# Altium PCB Omega2.PcbDoc
Units mm, origin at the board's own origin, x right, y up, seen from the top; angles counter-clockwise.
Board outline 58.75 x 75 mm, 2 copper layers (Top Layer, Bottom Layer); 44 components, 45 nets, 219 pads, 28 vias.
Unrouted connection lines stored in the file: 1.
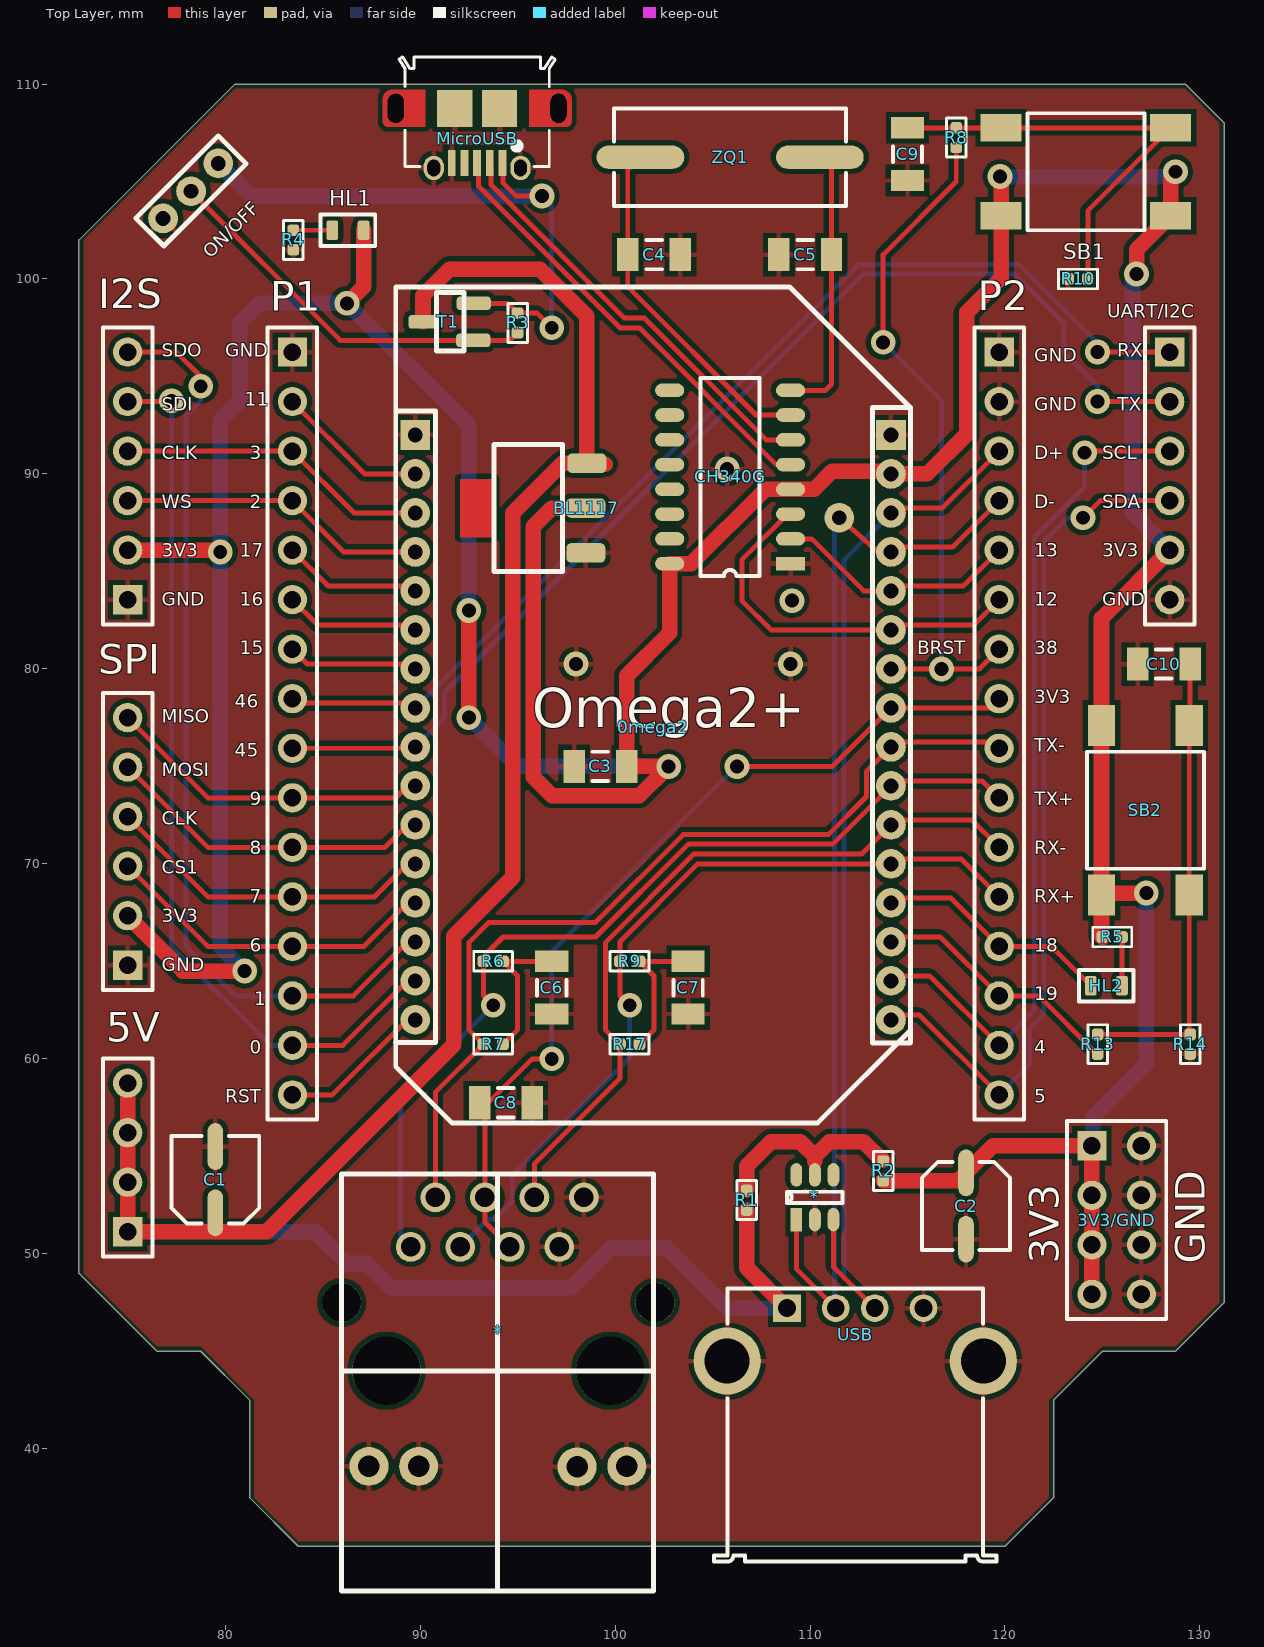
[diagram p0: Top Layer view]
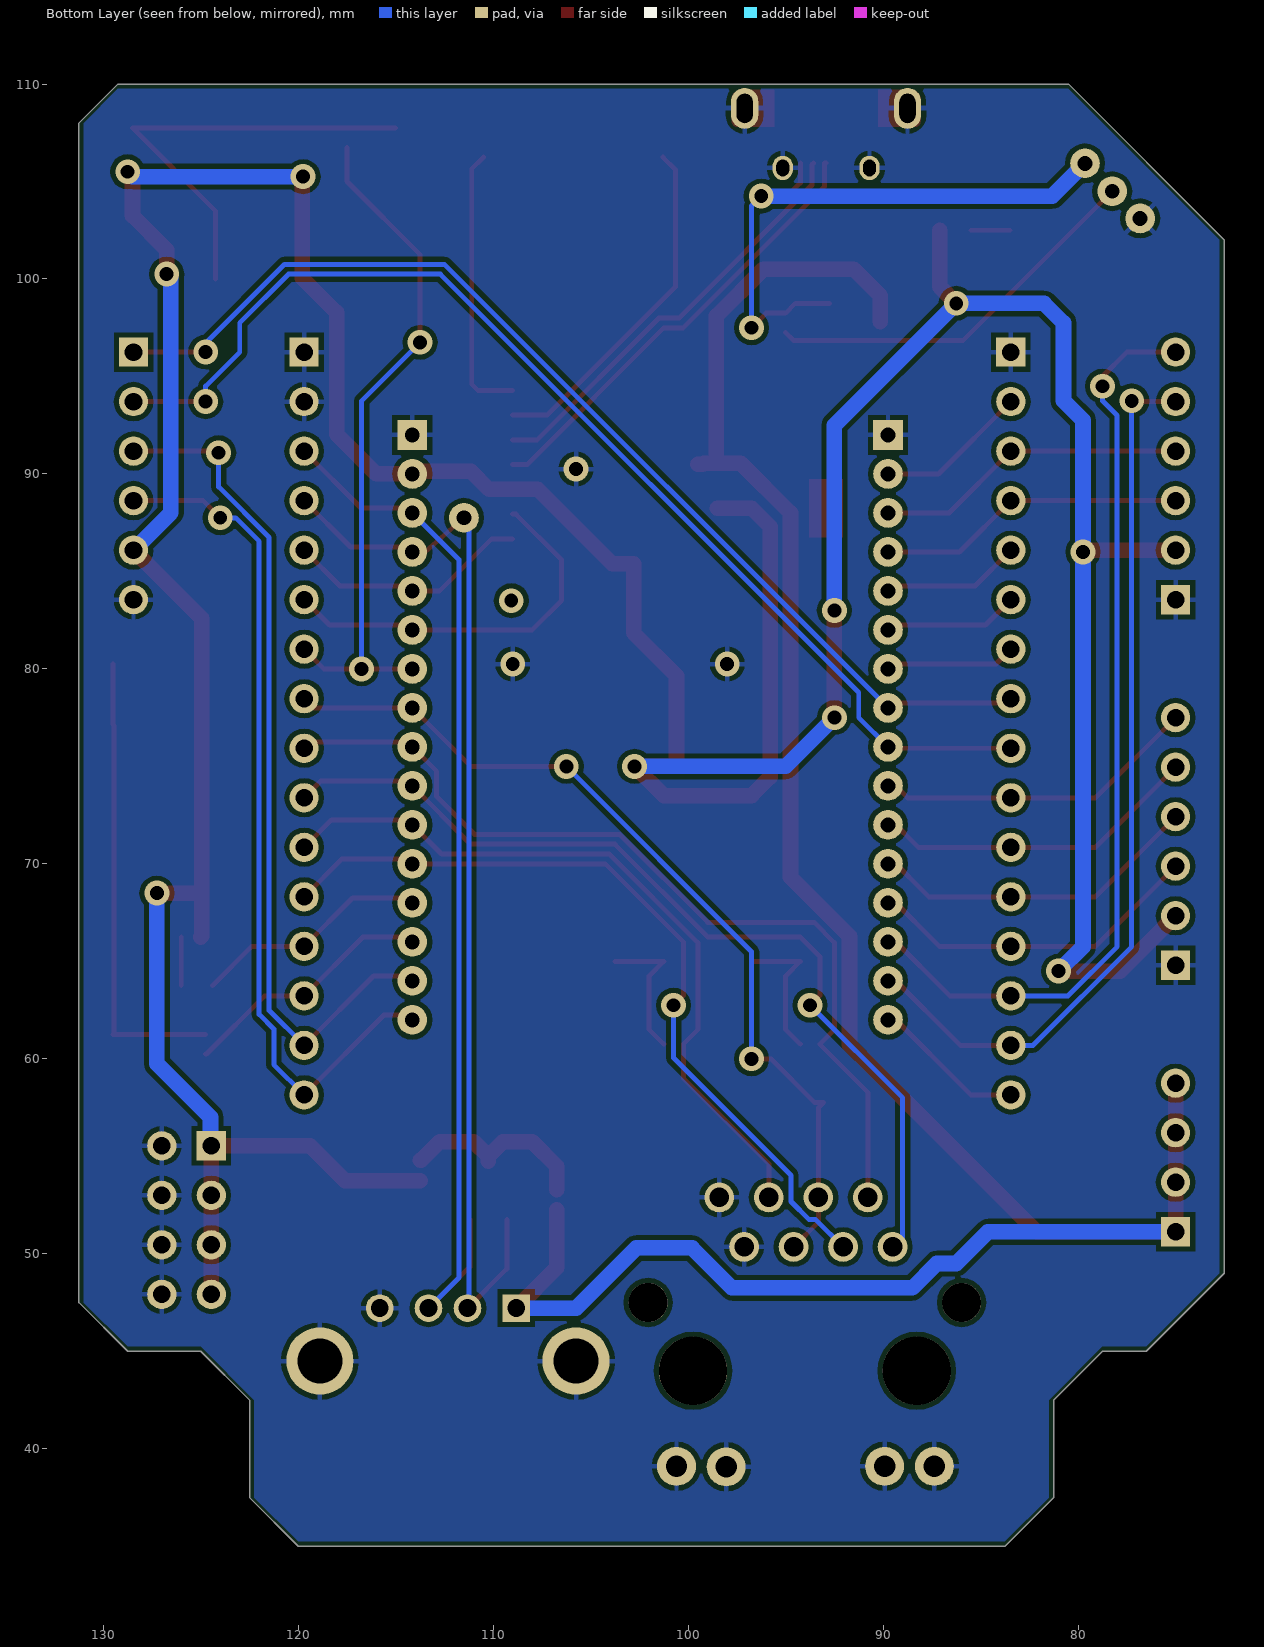
[diagram p1: Bottom Layer view, seen from below]

## Layer stack, top to bottom
Top Solder: solder mask 0.0102, Solder Resist, Dk 3.5
Top Layer: signal copper 0.0356
Dielectric 1: dielectric 0.32, FR-4, Dk 4.8
Bottom Layer: signal copper 0.0356
Bottom Solder: solder mask 0.0102, Solder Resist, Dk 3.5

## Board outline
78.75,45 81.25,42.5 81.25,37.5 83.75,35 120,35 122.5,37.5 122.5,42.5 125,45 128.75,45 131.25,47.5 131.25,108 129.25,110 80.5,110 72.5,102 72.5,49 76.5,45

## Design rules (kind name [scope] priority, off if disabled: settings)
Clearance [All] p1: gap=0.25 ignorepadtopadclearanceinfootprint=FALSE except(0.2: SMDPad-THPad)
ComponentClearance [All] p1 off: gap=0.254 collisioncheckmode=3 verticalgap=0.254 showdistances=TRUE
PolygonConnect [All] p1: connectstyle=Relief reliefconductorwidth=0.254 reliefentries=4 polygonreliefangle="90 Angle" airgapwidth=0.254
RoutingVias [All] p1: holewidth=0.4 width=0.8 viastyle="Through Hole" minholewidth=0.4 minwidth=0.8 maxholewidth=0.4 maxwidth=0.8
SolderMaskExpansion [All] p1: expansion=0.102 istentingtop=FALSE
Width [All] p1: maxlimit=10 minlimit=0.2 preferedwidth=0.8
29 further rules are at their usual default settings.

## Classes and differential pairs
component class OmegaDock: 3V3/GND 5V * BL1117 C1 C2 C3 C4 C5 C6 C7 C8 C9 C10 CH340G HL1 HL2 I2S MicroUSB ON/OFF P1 P2 R3 R4 R5 R6 R7 R8 R9 R10 R13 R14 R17 SB1 SB2 SPI T1 UART/I2C USB ZQ1

## Components (designator, comment, footprint, x,y, rotation, side; value= is the part's Value field where it differs from the comment)
0mega2 "Omega2" Omega2PCB 88.75,99.6 r0 top
3V3/GND "Header 4X2" HDR2X4 124.46,55.54 r270 top
5V "Header 4" HDR1X4 75,51.13 r90 top
* "SRV05-4" SOT23-6L 109.3,51.75 r90 top
* "RJ45" R911105A 101.975,54.1 r270 top
BL1117 "BL1117-3.3" SOT223 93.8,85 r90 top
C1 "/Укажите код маркировки/" C_Al_B 79.5,53.8 r180 top value="10 ìê"
C2 "/Укажите код маркировки/" C_Al_B 118,52.45 r0 top value="22 ìê"
C3 "Cap Semi" C1206 99.25,75 r180 top value=100pF
C4 "Cap Semi" C1206 102,101.25 r0 top value=22pF
C5 "Cap Semi" C1206 109.75,101.25 r180 top value=22pF
C6 "Cap Semi" C1206 96.75,63.65 r90 top value=100nF
C7 "Cap Semi" C1206 103.75,63.65 r90 top value=100nF
C8 "Cap Semi" C1206 94.4,57.75 r180 top value=100nF
C9 "Cap Semi" C1206 115,106.4 r90 top value=100nF
C10 "Cap Semi" C1206 128.15,80.25 r0 top value=100nF
CH340G "CH340G" SO16 109,85.4 r180 top
HL1 "0603 White" LED_0603_White_Manual_mount 86.3,102.5 r0 top
HL2 "blue" LED_0603_Blue_Manual_mount 125.2,63.75 r0 top
I2S "Header 6" HDR1X6 75,83.55 r90 top
MicroUSB "629105150921" 629105150921 92.925,108.455 r180 top
ON/OFF "SlideSwitch" SlideSwitch 79.647,105.932 r225 top
P1 "Header 16" HDR1X16 83.45,96.25 r270 top
P2 "Header 16" HDR1X16 119.7,96.25 r270 top
R1 "/Укажите код маркирвки/" R_0402_Manual_mount 106.75,52.75 r270 top value="1 ê"
R2 "/Укажите код маркирвки/" R_0402_Manual_mount 113.75,54.25 r270 top value="1 ê"
R3 "/Укажите код маркирвки/" R_0402_Manual_mount 95,97.75 r270 top value="10 ê"
R4 "/Укажите код маркирвки/" R_0402_Manual_mount 83.5,102 r270 top value="1 ê"
R5 "/Укажите код маркирвки/" R_0402_Manual_mount 125.5,66.25 r0 top value="1 ê"
R6 "/Укажите код маркирвки/" R_0402_Manual_mount 93.75,65 r0 top value=50
R7 "/Укажите код маркирвки/" R_0402_Manual_mount 93.75,60.75 r0 top value=50
R8 "/Укажите код маркирвки/" R_0402_Manual_mount 117.5,107.25 r270 top value="1 ê"
R9 "/Укажите код маркирвки/" R_0402_Manual_mount 100.75,65 r0 top value=50
R10 "/Укажите код маркирвки/" R_0402_Manual_mount 123.75,100 r180 top value="3 ê"
R13 "/Укажите код маркирвки/" R_0402_Manual_mount 124.75,60.75 r270 top value="1 ê"
R14 "/Укажите код маркирвки/" R_0402_Manual_mount 129.5,60.75 r270 top value="3 ê"
R17 "/Укажите код маркирвки/" R_0402_Manual_mount 100.75,60.75 r0 top value=50
SB1 "Tact_switch" Tact_switch_6x6x7 124.15,105.5 r0 top
SB2 "Tact_switch" Tact_switch_6x6x7 127.2,72.75 r90 top
SPI "Header 6" HDR1X6 75,64.8 r90 top
T1 "SomeSemiconductor" SOT23 90.85,96.3 r90 top
UART/I2C "Header 6" HDR1X6 128.45,96.25 r270 top
USB "61400416021" 61400416021 112.32,41.22 r0 top
ZQ1 "/Укажите код маркировки/" HC-49SM 105.9,106.25 r0 top value="12 ÌÃö"

## Footprints (in the part's own frame and the unit in brackets; to place one, negate y for a bottom-side part, rotate by r counter-clockwise, add the part's x,y. Pads: shape width x height; smd on the part's side, far side on the other; paste and mask are expansions set on the pad)
61400416021 [mm] "USB 2.0 Type A Horizontal"
  rect 1.42x1.42 hole 0.92: 1(-3.5,5.99)
  round 1.42 hole 0.92: 2(-1,5.99) 3(1,5.99) 4(3.5,5.99)
  round 3.45 hole 2.3: Shell(-6.57,3.28) Shell(6.57,3.28)
  silkscreen extent -7.25,-7 7.25,7, body extent -8,-7 8,7, height 7.63
629105150921 [mm] "Micro USB 2.0 Type AB Horizontal"
  rect 0.4x1.35 smd: 1(-1.3,2.51) 2(-0.65,2.51) 3(0,2.51) 4(0.65,2.51) 5(1.3,2.51)
  round 0 / inner round 0 / far side oval 1.4x2.1 hole 0.825 slot 1.5 at 90 deg mask+0.102: Shell(-4.175,-0.295) Shell(4.175,-0.295)
  oval 1.05x1.25 hole 0.65 slot 0.85 at 90 deg: Shell(-2.225,2.76) Shell(2.225,2.76)
  rect 1.8x1.9 smd: Shell(-1.15,-0.295) Shell(1.15,-0.295)
  Top Layer region: 4.353,-1.245 4.544,-1.207 4.706,-1.099 4.814,-0.936 4.852,-0.745 4.852,-0.745 4.852,0.355 4.83,0.47 4.765,0.567 4.667,0.632 4.553,0.655 4.553,0.655 2.668,0.655 2.668,-1.245
  Top Layer region: -4.353,-1.245 -4.544,-1.207 -4.706,-1.099 -4.814,-0.936 -4.852,-0.745 -4.852,-0.745 -4.852,0.355 -4.83,0.47 -4.765,0.567 -4.667,0.632 -4.553,0.655 -4.553,0.655 -2.668,0.655 -2.668,-1.245
  silkscreen extent -4,-2.94 4,2.68, body extent -4.3,-2.93 4.3,2.93, height 2.78
C1206 [mm] "Chip Capacitor, Body 3.2x1.6mm, IPC High Density"
  rect 1.1x1.7 smd: 1(-1.35,0) 2(1.35,0)
  silkscreen extent -0.4,-0.75 0.4,0.75, body extent -1.7,-0.9 1.7,0.9, height 1.3
C_Al_B [mm] "D=4; L=5.4; A=4.3; P=1."
  oval 0.8x2.4 smd: 1(0,1.7) 2(0,-1.7)
  silkscreen extent -2.25,-2.25 2.25,2.25, body extent -2.15,-2.3 2.15,2.3, height 5.4
HC-49SM [mm] "SMD quartz"
  oval 4.5x1.2 smd: 1(-4.6,0) 2(4.6,0)
  silkscreen extent -5.95,-2.5 5.95,2.5, body extent -6.25,-2.4 6.25,2.4, height 4
HDR1X4 [mm] "Connector; Header; 4 Position"
  rect 1.5x1.5 hole 0.9: 1(0,0)
  round 1.5 hole 0.9: 2(2.54,0) 3(5.08,0) 4(7.62,0)
  silkscreen extent -1.27,-1.27 8.89,1.27, body extent -0.85,-0.85 8.47,0.85, height 10
HDR1X6 [mm] "Connector; Header; 6 Position"
  rect 1.5x1.5 hole 0.9: 1(0,0)
  round 1.5 hole 0.9: 2(2.54,0) 3(5.08,0) 4(7.62,0) 5(10.16,0) 6(12.7,0)
  silkscreen extent -1.27,-1.27 13.97,1.27, body extent -0.85,-0.85 13.55,0.85, height 10
HDR1X16 [mm] "Connector; Header; 16 Position"
  rect 1.5x1.5 hole 0.9: 1(0,0)
  round 1.5 hole 0.9: 2(2.54,0) 3(5.08,0) 4(7.62,0) 5(10.16,0) 6(12.7,0) 7(15.24,0) 8(17.78,0) 9(20.32,0) 10(22.86,0) 11(25.4,0) 12(27.94,0) 13(30.48,0) 14(33.02,0) 15(35.56,0) 16(38.1,0)
  silkscreen extent -1.27,-1.27 39.37,1.27, body extent -0.85,-0.85 38.95,0.85, height 10
HDR2X4 [mm] "Connector; Header; 4x2 Position"
  rect 1.5x1.5 hole 0.9: 1(0,0)
  round 1.5 hole 0.9: 2(0,2.54) 3(2.54,0) 4(2.54,2.54) 5(5.08,0) 6(5.08,2.54) 7(7.62,0) 8(7.62,2.54)
  silkscreen extent -1.27,-1.27 8.89,3.81, body extent -0.85,-0.85 8.47,3.39, height 10
LED_0603_Blue_Manual_mount [mm] "SMD 0603"
  rrect35% 0.6x1 smd: A(0.8,0) C(-0.8,0)
  silkscreen extent -1.4,-0.8 1.4,0.8, body extent -0.8,-0.43 0.8,0.43, height 0.45
LED_0603_White_Manual_mount [mm] "SMD 0603"
  rrect35% 0.6x1 smd: A(0.8,0) C(-0.8,0)
  silkscreen extent -1.4,-0.8 1.4,0.8, body extent -0.8,-0.43 0.8,0.43, height 0.45
Omega2PCB [mil]
  rect 60x60 hole 30: 1(39.37,-299.21) 32(1000,-299.21)
  round 60 hole 30: 2(39.37,-377.95) 3(39.37,-456.69) 4(39.37,-535.43) 5(39.37,-614.17) 6(39.37,-692.91) 7(39.37,-771.65) 8(39.37,-850.39) 9(39.37,-929.13) 10(39.37,-1007.87) 11(39.37,-1086.61) 12(39.37,-1165.35) 13(39.37,-1244.09) 14(39.37,-1322.83) 15(39.37,-1401.57) 16(39.37,-1480.31) 17(1000,-1480.31) 18(1000,-1401.57) 19(1000,-1322.83) 20(1000,-1244.09) 21(1000,-1165.35) 22(1000,-1086.61) 23(1000,-1007.87) 24(1000,-929.13) 25(1000,-850.39) 26(1000,-771.65) 27(1000,-692.91) 28(1000,-614.17) 29(1000,-535.43) 30(1000,-456.69) 31(1000,-377.95)
  silkscreen extent 0,-1689 1039,0
R911105A [mm]
  round 1.524 hole 1: 1(3.75,-12.46) 2(1.21,-11.19) 3(3.75,-9.92) 4(1.21,-8.65) 5(3.75,-7.38) 6(1.21,-6.11) 7(3.75,-4.84) 8(1.21,-3.57)
  round 2 hole 1.1: 9(15,-14.6) 10(15,-12.05) 11(15.025,-3.925) 12(15,-1.375)
  round 2 hole 2: X(6.6,-16) X(6.6,0.075)
  round 3.5 hole 3.5: X(10.1,-13.7) X(10.1,-2.225)
  silkscreen extent 0,-16 21.4,0
R_0402_Manual_mount [mm] "SMD 0402"
  rrect50% 0.6x0.6 smd: 1(-0.5,0) 2(0.5,0)
  silkscreen extent -1,-0.5 1,0.5, body extent -0.5,-0.25 0.5,0.25, height 0.35
SlideSwitch [mil]
  round 60 hole 30: 0(0,0) 1(78.74,0.98) 2(157.48,0)
  silkscreen extent -39,-39 196,40, body extent -34,-34 191,35, height 394
SO16 [mm]
  rect 1.5x0.7 smd: 1(0,0)
  oval 1.5x0.7 smd: 2(0,-1.27) 3(0,-2.54) 4(0,-3.81) 5(0,-5.08) 6(0,-6.35) 7(0,-7.62) 8(0,-8.89) 9(6.2,-8.89) 10(6.2,-7.62) 11(6.2,-6.35) 12(6.2,-5.08) 13(6.2,-3.81) 14(6.2,-2.54) 15(6.2,-1.27) 16(6.2,0)
  silkscreen extent 1.59,-9.53 4.62,0.63, body extent 1.58,-9.53 4.62,0.64, height 2
SOT23 [mm]
  rrect50% 0.7x1.75 smd: 0(0.55,-1.875) 1(2.45,-1.9)
  rrect50% 0.7x1.5 smd: 2(1.5,0.7)
  silkscreen extent 0,-1.4 3,0, body extent -0.13,-1.53 3.13,0.13, height 2
SOT23-6L [mm]
  rect 1.2x0.6 smd: 1(0,0)
  oval 1.2x0.6 smd: 2(0,-0.95) 3(0,-1.9) 4(2.3,-1.9) 5(2.3,-0.95) 6(2.3,0)
  silkscreen extent 0.87,-2.38 1.43,0.48
SOT223 [mm]
  rrect50% 1x2 smd: 1(5.55,-4.75) 2(0.95,-4.7) 3(3.25,-4.7)
  Top Layer region: 1.75,0 4.75,0 4.75,1.75 1.75,1.75
  silkscreen extent 0,-3.5 6.5,0, body extent -0.13,-3.63 6.63,0.13, height 2
Tact_switch_6x6x7 [mm] "Tact switch"
  rect 2.1x1.4 smd: 1(-4.35,2.25) 1(4.35,2.25) 2(-4.35,-2.25) 2(4.35,-2.25)
  silkscreen extent -3,-3 3,3, body extent -5,-3 5,3, height 7

## Part data
3V3/GND: "Header, 4-Pin, Dual row", LatestRevisionDate=17-Jul-2002, LatestRevisionNote="Re-released for DXP Platform.", Publisher="Altium Limited"
5V: "Header, 4-Pin", LatestRevisionDate=17-Jul-2002, LatestRevisionNote="Re-released for DXP Platform.", Publisher="Altium Limited"
C1 C2: library part Capacitor_Electrolytic_B, "SMD Electrolytic Capacitor", Manufacturer="/Óêàæèòå êîìïàíèþ-ïðîèçâîäèòåëÿ/", Rated voltage="25 Â", Temperature range="/Ôîðìàò: -? ... ? °C/", Tolerance="/Óêàæèòå äîïóñê â ïðîöåíòàõ/", ESR="/Óêàæèòå çíà÷åíèå ÝÏÑ/", Size=B, Type="Êîíäåíñàòîð ýëåêòðîëèòè÷åñêèé"
C3 C4 C5 C6 C7 C8 C9 C10: "Capacitor (Semiconductor SIM Model)", LatestRevisionDate=29-May-2009, LatestRevisionNote="IPC-7351 Footprint Added.", PackageDescription="Chip Capacitor", PackageReference=C1206, Published=8-Jun-2000, Publisher="Altium Limited"
HL1 HL2: library part "LED 0603", "SMD LED", Color="/Óêàæèòå öâåò/", Forward voltage="/Óêàæèòå ïðÿìîå íàïðÿæåíèå/", Manufacturer="/Óêàæèòå êîìïàíèþ-ïðîèçâîäèòåëÿ/", Max. forward current="/Óêàæèòå äîïóñòèìûé ïðÿìîé òîê/", Max. reverse voltage="/Óêàæèòå ìàêñèìàëüíîå îáðàòíîå íàïðÿæåíèå/", Power dissitipation="/Óêàæèòå ìàêñèìàëüíóþ ðàññåèâàåìóþ ìîùíîñòü/", Temperature range="/Ôîðìàò: -? ... ? °C/", Size=0603, Type=Ñâåòîäèîä
I2S SPI UART/I2C: "Header, 6-Pin", LatestRevisionDate=17-Jul-2002, LatestRevisionNote="Re-released for DXP Platform.", Publisher="Altium Limited"
MicroUSB: "Micro USB 2.0 Type AB Horizontal WR-COM", ComponentLink1Description=Manufacturer, ComponentLink1URL=http://www.we-online.de, ComponentLink2Description=Datasheet, ComponentLink2URL=http://katalog.we-online.de/em/datasheet/629105150921.pdf, Construction=SMT, Gender=Receptacle, Interface Type="Type AB", Part Number=629105150921, Published Date="April 2017", Publisher="Wurth Elektronik", Sub-Family="Micro USB 2.0", Type=Horizontal
P1 P2: "Header, 16-Pin", LatestRevisionDate=17-Jul-2002, LatestRevisionNote="Re-released for DXP Platform.", Publisher="Altium Limited"
R1 R2 R3 R4 R5 R6 R7 R8 R9 R10 R13 R14 R17: library part Resistor, "SMD Resistor", Manufacturer="/Óêàæèòå êîìïàíèþ-ïðîèçâîäèòåëÿ/", Power dissitipation="/Óêàæèòå ìàêñèìàëüíóþ ðàññåèâàåìóþ ìîùíîñòü/", Temperature coefficient="/Ôîðìàò: ±? ppm/°C/", Temperature range="/Ôîðìàò: -? ... ? °C/", Tolerance="/Óêàæèòå äîïóñê â ïðîöåíòàõ/", Size="/Óêàæèòå äþéìîâûé òèïîðàçìåð/", Type="Ðåçèñòîð ïîñòîÿííûé"
SB1 SB2: "SMD pushbutton", Junction resistance="100 ìÎì", Manufacturer=NONAME, Rated current="50 ìÀ", Rated voltage="12 Â", Life cycles=100000, Type="Âûêëþ÷àòåëü êíîïî÷íûé ñ ñàìîâîçâðàòîì"
USB: "USB 2.0 Type A Horizontal WR-COM", ComponentLink1Description=Manufacturer, ComponentLink1URL=http://www.we-online.de, ComponentLink2Description=Datasheet, ComponentLink2URL=http://katalog.we-online.de/em/datasheet/61400416021.pdf, Construction=THT, Gender=Receptacle, Interface Type="Type A", Part Number=61400416021, Published Date="April 2017", Publisher="Wurth Elektronik", Sub-Family="USB 2.0", Type=Horizontal
ZQ1: library part Quartz, "QUARTZ CRYSTAL", Frequency stability="/Ôîðìàò: ±? ppm/", Load capacitance="/Óêàæèòå íîìèíàë íàãðóçî÷íîé åìêîñòè/", Manufacturer="/Óêàæèòå êîìïàíèþ-ïðîèçâîäèòåëÿ/", Temperature range="/Ôîðìàò: -? ... ? °C/", Type="Êâàðöåâûé ðåçîíàòîð"

## Free pads (board coordinates)
  round 1.524 hole 0.762: 4(111.5,87.75)

## Via types
v1: diameter 1.27, hole 0.711, Top Layer to Bottom Layer, 28 vias

## Nets (pads, with @x,y where several pads share a name; then routed paths per layer and width w, separated by ;. In a path a pad name is that pad's centre, name@x,y a point inside that pad or via, vN(x,y) a via of type N, cw(c..) or ccw(c..) an arc to the next point about the centre after c; other vN are vias at no path point)
3V3: 0mega2.31 3V3/GND.1 3V3/GND.3 3V3/GND.5 3V3/GND.7 BL1117.3 C2.1 C3.1 CH340G.4 CH340G.16 HL1.A I2S.2 R2.2 R5.1 SB1.2 SB2.1 SPI.2 UART/I2C.5 | length 247.8
  Top Layer w0.8: SPI.2 77.84,64.5 v1(81,64.5) ; I2S.2 79.66,86.09 v1(79.75,86) ; v1(86.25,98.75) 87.1,99.6 HL1.A ; v1(92.5,77.5) v1(92.5,83) ; BL1117.3 96.75,88.25 95.8,87.3 95.8,74.45 96.75,73.5 101.25,73.5 v1(102.75,75) C3.1 100.6,77.5 100.6,79.65 102.8,81.85 CH340G.16 103.9,85.4 107.71,89.21 CH340G.4 110.21,89.21 111.135,90.135 114.015,90.135 0mega2.31 116,90 118.035,92.035 118.035,98.285 119.8,100.05 119.8,103.25 119.8,105.2 v1(119.75,105.25) ; R2.2 117.6,53.75 C2.1 119.39,55.54 3V3/GND.1 3V3/GND.3 3V3/GND.5 3V3/GND.7 ; R5.1 124.95,66.3 SB2.1@124.95,68.4 ; v1(126.75,100.25) 126.75,101.5 128.5,103.25 128.5,105.25 v1(128.75,105.5) ; v1(127.25,68.5) 125.05,68.5 SB2.1@124.95,68.4 ; UART/I2C.5 124.95,82.59 124.95,77.1 SB2.1@124.95,68.4
  Bottom Layer w0.8: v1(81,64.5) 79.75,65.75 v1(79.75,86) 79.75,92.75 80.75,93.75 80.75,97.75 81.75,98.75 v1(86.25,98.75) 92.5,92.5 v1(92.5,83) ; v1(92.5,77.5) 95,75 v1(102.75,75) ; v1(119.75,105.25) 128.5,105.25 v1(128.75,105.5) ; 3V3/GND.1 124.5,55.58 124.5,57 127.25,59.75 v1(127.25,68.5) ; v1(126.75,100.25) 126.54,100.04 126.54,88 UART/I2C.5
BTN1: 0mega2.19 P2.14 R13.2 | length 13.2
  Top Layer w0.254: 0mega2.19@114,66.25 116.68,66.25 P2.14 121.725,63.23 124.705,60.25 R13.2
CS1: 0mega2.13 P1.13 SPI.3 | length 17.3
  Top Layer w0.254: SPI.3 79.11,65.77 P1.13 87.12,65.77 0mega2.13@89.6,68.25
GND: 0mega2.1 0mega2.32 3V3/GND.2 3V3/GND.4 3V3/GND.6 3V3/GND.8 *.2@110.25,51.75 *.7 *.8 *.9 *.10 *.11 *.12 BL1117.2 C1.2 C2.2 C3.2 C4.2 C5.2 C6.1 C7.1 C8.1 C9.1 C10.1 CH340G.1 I2S.1 MicroUSB.5 MicroUSB.Shell ON/OFF.2 P1.1 P2.1 P2.2 R4.2 R10.2 R14.2 SPI.1 UART/I2C.6 USB.4 USB.Shell
  other v1: 98,80.25 109,80.25 105.75,90.25
I2S_CLK: 0mega2.3 I2S.4 P1.3 | length 16.1
  Top Layer w0.254: I2S.4 P1.3 86.62,88 0mega2.3@89.76,88
LED1: 0mega2.20 HL2.C P2.13 | length 12.3
  Top Layer w0.254: 0mega2.20@114,68.25 117.22,68.25 P2.13 122.38,65.77 HL2.C
MISO: 0mega2.10 P1.10 SPI.6 | length 16.7
  Top Layer w0.254: SPI.6 79.11,73.39 P1.10 88.74,73.39 0mega2.10@89.6,74.25
MOSI: 0mega2.11 P1.11 SPI.5 | length 16.9
  Top Layer w0.254: SPI.5 79.11,70.85 P1.11 88.2,70.85 0mega2.11@89.6,72.25
Net0mega2_2: 0mega2.2 P1.2 | length 7.8
  Top Layer w0.254: P1.2 87.16,90 0mega2.2@89.76,90
Net0mega2_5: 0mega2.5 P1.5 | length 6.9
  Top Layer w0.254: P1.5 85.29,84.25 0mega2.5@89.6,84.25
Net0mega2_6: 0mega2.6 P1.6 | length 6.7
  Top Layer w0.254: P1.6 84.75,82.25 0mega2.6@89.6,82.25
Net0mega2_7: 0mega2.7 P1.7 | length 6.5
  Top Layer w0.254: P1.7 84.21,80.25 0mega2.7@89.6,80.25
Net*_5: *.5@110.25,54.05 R1.1 R2.1 | length 10
  Top Layer w0.8: R1.1@106.75,53.3 106.75,54.5 108,55.75 109.5,55.75 110.25,55 ; 110.25,54.744 110.25,55 ; R2.1@113.75,54.8 113.7,54.8 112.75,55.75 111,55.75 110.25,55
NET_POW: 0mega2.25 *.4@93.325,52.89 *.5@94.595,50.35 C8.2 P2.8 | length 46.5
  Top Layer w0.254: *.5@94.595,50.35 93.325,51.62 93.325,52.89 93.325,57.475 C8.2 93.5,57.75 95.75,60 v1(96.75,60) ; v1(106.25,75) 111.15,75 0mega2.25 119.23,78 P2.8
  Bottom Layer w0.254: v1(96.75,60) 96.75,65.5 v1(106.25,75)
NetC4_1: C4.1 CH340G.7 ZQ1.1 | length 18
  Top Layer w0.254: ZQ1.1 100.65,105.6 C4.1 100.65,99.6 107.23,93.02 CH340G.7
NetC5_1: C5.1 CH340G.8 ZQ1.2 | length 14.1
  Top Layer w0.254: CH340G.8 110.79,94.29 111.1,94.6 C5.1 111.1,105.65 ZQ1.2
NetC6_2: C6.2 R6.2 R7.2 | length 7.4
  Top Layer w0.254: R7.2 95,61.5 95,64.25 R6.2 C6.2
NetC7_2: C7.2 R9.2 R17.2 | length 7.4
  Top Layer w0.254: R17.2 102,61.5 102,64.25 R9.2 C7.2
NetC9_2: C9.2 R8.1 R10.1 SB1.1 | length 23
  Top Layer w0.254: C9.2 R8.1 119.8,107.75 128.5,107.75 124.25,103.5 R10.1
NetC10_2: C10.2 R13.1 R14.1 SB2.2 | length 23.8
  Top Layer w0.254: R13.1 R14.1 129.45,61.3 129.45,68.4 129.45,77.1 129.5,77.15 C10.2
NetHL1_C: HL1.C R4.1 | length 2
  Top Layer w0.254: R4.1 HL1.C
NetHL2_A: HL2.A R5.2 | length 2.5
  Top Layer w0.254: HL2.A R5.2
NetMicroUSB_1: MicroUSB.1 ON/OFF.0 R3.1 T1.1 | length 32.1
  Top Layer w0.254: T1.1 94.5,98.75 R3.1 96,98.25 v1(96.75,97.5) ; MicroUSB.1 94.248,105.922 94.248,104.93 94.928,104.25 v1(96.25,104.25)
  Bottom Layer w0.254: v1(96.25,104.25) 96.75,103.75 v1(96.75,97.5)
  Bottom Layer w0.8: ON/OFF.0 81.328,104.25 v1(96.25,104.25)
NetON/OFF_1: ON/OFF.1 R3.2 T1.0 | length 20.1
  Top Layer w0.254: ON/OFF.1 85.9,96.85 T1.0 94.6,96.85 R3.2
RESET_BTN: 0mega2.26 P2.7 R8.2 | length 35.5
  Top Layer w0.254: v1(113.75,96.75) 113.75,101.25 117.5,105 R8.2 ; 0mega2.26 v1(116.75,80) 118.69,80 P2.7
  Bottom Layer w0.254: v1(113.75,96.75) 116.75,93.75 v1(116.75,80)
RST: 0mega2.16 P1.16 | length 7.8
  Top Layer w0.254: P1.16 85.5,58.15 0mega2.16@89.6,62.25
RX1: 0mega2.8 P1.8 UART/I2C.1 | length 56.5
  Top Layer w0.254: P1.8 83.67,78.25 0mega2.8@89.6,78.25 ; v1(124.75,96.25) UART/I2C.1
  Bottom Layer w0.254: 0mega2.8 112.504,100.754 120.709,100.754 124.75,96.713 v1(124.75,96.25)
RX+: 0mega2.21 *.3@92.055,50.35 P2.12 R9.1 | length 41.7
  Top Layer w0.254: v1(100.75,62.75) 100.25,63.25 R9.1 100.25,66 104.25,70 0mega2.21@114.16,70 ; 0mega2.21@114,70.25 117.76,70.25 P2.12
  Bottom Layer w0.254: *.3@92.055,50.35 93.456,51.751 93.797,51.751 94.726,52.68 94.726,54.029 100.75,60.053 v1(100.75,62.75)
RX-: 0mega2.22 *.6@95.865,52.89 P2.11 R17.1 | length 38.6
  Top Layer w0.254: *.6@95.865,52.89 95.865,54.615 100.25,59 R17.1 99.5,61.5 99.5,65.963 104.041,70.504 112.654,70.504 0mega2.22 ; 0mega2.22@114,72.25 118.3,72.25 P2.11
RXD: 0mega2.28 CH340G.2 P2.5 | length 12.7
  Top Layer w0.254: CH340G.2 110.08,86.67 112.75,84 0mega2.28 ; 0mega2.28@114,84.25 117.86,84.25 P2.5
SCL: 0mega2.18 P2.15 UART/I2C.3 | length 43.8
  Top Layer w0.254: 0mega2.18@114,64.25 116.14,64.25 P2.15 ; v1(124.085,91.085) 124.17,91.17 UART/I2C.3
  Bottom Layer w0.254: P2.15 121.5,62.49 121.5,86.75 124.085,89.335 v1(124.085,91.085)
SDA: 0mega2.17 P2.16 UART/I2C.4 | length 44.1
  Top Layer w0.254: 0mega2.17@114,62.25 115.6,62.25 P2.16 ; v1(124,87.75) 124.88,88.63 UART/I2C.4
  Bottom Layer w0.254: P2.16 121.25,59.7 121.25,61.527 122.004,62.281 122.004,86.541 123.213,87.75 v1(124,87.75)
SDI: 0mega2.15 I2S.5 P1.15 | length 46.2
  Top Layer w0.254: I2S.5 77.21,93.71 v1(77.25,93.75) ; P1.15 86.04,60.69 0mega2.15@89.6,64.25
  Bottom Layer w0.254: v1(77.25,93.75) 77.25,65.75 82.31,60.69 P1.15
SDO: 0mega2.14 I2S.6 P1.14 | length 47.7
  Top Layer w0.254: I2S.6 77.5,96.25 78.75,95 v1(78.75,94.5) ; P1.14 86.58,63.23 0mega2.14@89.6,66.25
  Bottom Layer w0.254: v1(78.75,94.5) 78.75,93.75 78,93 78,65.75 80.52,63.23 P1.14
SPI_CLK: 0mega2.12 P1.12 SPI.4 | length 17.1
  Top Layer w0.254: SPI.4 79.11,68.31 P1.12 87.66,68.31 0mega2.12@89.6,70.25
TX1: 0mega2.9 P1.9 UART/I2C.2 | length 59.8
  Top Layer w0.254: P1.9 89.28,75.93 0mega2.9@89.6,76.25 ; v1(124.75,93.71) UART/I2C.2
  Bottom Layer w0.254: 0mega2.9 91.25,77.5 91.25,78.787 112.713,100.25 120.5,100.25 123,97.75 123,96.25 124.75,94.5 v1(124.75,93.71)
TX+: 0mega2.23 *.1@89.515,50.35 P2.10 R6.1 | length 47.9
  Top Layer w0.254: v1(93.75,62.75) 93.25,63.25 R6.1 93.25,65.25 94.25,66.25 99,66.25 103.758,71.008 111.168,71.008 0mega2.23@114.16,74 ; 0mega2.23@114,74.25 118.84,74.25 P2.10
  Bottom Layer w0.254: *.1@89.515,50.35 89,50.865 89,58 v1(93.75,62.75)
TX-: 0mega2.24 *.2@90.785,52.89 P2.9 R7.1 | length 46.8
  Top Layer w0.254: *.2@90.785,52.89 90.785,58.285 R7.1 92.5,61.5 92.5,65.963 93.537,67 99,67 103.5,71.5 103.488,71.512 110.959,71.512 112.9,73.453 112.9,74.75 0mega2.24 ; 0mega2.24@114,76.25 119.38,76.25 P2.9
TXD: 0mega2.27 CH340G.3 P2.6 | length 20.2
  Top Layer w0.254: CH340G.3 108.842,87.94 106.5,85.598 106.5,83.5 108,82 0mega2.27 0mega2.27@114.15,82.1 ; 0mega2.27@114,82.25 118.4,82.25 P2.6
UD+: CH340G.5 MicroUSB.3 | length 23.2
  Top Layer w0.254: MicroUSB.3 92.998,105.945 92.998,104.755 100.257,97.496 101.254,97.496 108.27,90.48 CH340G.5
UD-: CH340G.6 MicroUSB.2 | length 21.9
  Top Layer w0.254: MicroUSB.2 93.648,105.872 93.648,104.817 100.465,98 101.5,98 107.75,91.75 CH340G.6
USB+: 0mega2.30 *.3@111.2,51.75 P2.3 USB.3 | length 54.8
  Top Layer w0.254: *.3@111.2,51.75 111.2,49.33 USB.3 ; 0mega2.30@114,88.25 116.78,88.25 P2.3
  Bottom Layer w0.254: USB.3 111.754,48.776 111.754,85.604 0mega2.30
USB-: 0mega2.29 *.1@109.3,51.75 P2.4 pad.4 USB.2 | length 56
  Top Layer w0.254: *.1@109.3,51.75 109.3,49.23 USB.2 ; pad.4 113.5,86 0mega2.29 ; 0mega2.29@114,86.25 117.32,86.25 P2.4
  Bottom Layer w0.254: USB.2 111.25,47.28 111.25,87.5 pad.4
VCC5V: 5V.1 5V.2 5V.3 5V.4 BL1117.1 C1.1 R1.2 T1.2 USB.1 | length 124.6
  Top Layer w0.8: 5V.4 5V.3 5V.2 5V.1 82.13,51.13 91.723,60.723 91.723,66.285 94.75,69.312 94.75,88 97.3,90.55 BL1117.1 ; T1.2 90.15,99.15 91.5,100.5 96.154,100.5 98.55,98.104 BL1117.1 ; BL1117.1@99.5,90.5 99.25,90.5 99.2,90.55 BL1117.1 ; R1.2 106.75,49.28 USB.1
  Bottom Layer w0.8: 5V.1 84.62,51.13 86.25,49.5 87.25,49.5 88.5,48.25 97.75,48.25 99.8,50.3 102.66,50.3 105.75,47.21 USB.1
WS: 0mega2.4 I2S.3 P1.4 | length 15.8
  Top Layer w0.254: I2S.3 P1.4 86.08,86 0mega2.4@89.76,86
pads on no net: *.4@111.2,54.05 *.6@109.3,54.05 *.X CH340G.9 CH340G.10 CH340G.11 CH340G.12 CH340G.13 CH340G.14 CH340G.15 MicroUSB.4
copper on no net:
  other v1: 109.071,83.5

## Polygon pours and split planes (outlines as drawn)
GND on Bottom Layer "GND_L02_P048" (solid, remove dead copper, pour order 48): 72.75,102 80.5,109.75 129.25,109.75 131,108 131,47.5 128.75,45.25 125,45.25 122.25,42.5 122.25,37.5 120,35.25 83.75,35.25 81.5,37.5 81.5,42.5 78.75,45.25 76.5,45.25 72.75,49
GND on Top Layer "GND_L01_P046" (solid, remove dead copper, pour order 46): 72.75,102 80.5,109.75 129.25,109.75 131,108 131,47.5 128.75,45.25 125,45.25 122.25,42.5 122.25,37.5 120,35.25 83.75,35.25 81.5,37.5 81.5,42.5 78.75,45.25 76.5,45.25 72.75,49

## Silkscreen, mask and mechanical layers (free items; w line width, h text height)
Top Overlay:
  text "SDO" at 76.75,96 h0.7
  text "GND" at 80,96 h0.7
  text "RX" at 125.75,96 h0.7
  text "GND" at 121.5,95.75 h0.7
  text "11" at 81,93.5 h0.7
  text "SDI" at 76.75,93.25 h0.7
  text "GND" at 121.5,93.25 h0.7
  text "TX" at 125.75,93.25 h0.7
  text "CLK" at 76.75,90.75 h0.7
  text "3" at 81.25,90.75 h0.7
  text "D+" at 121.5,90.75 h0.7
  text "SCL" at 125,90.75 h0.7
  text "WS" at 76.75,88.25 h0.7
  text "2" at 81.25,88.25 h0.7
  text "D-" at 121.5,88.25 h0.7
  text "SDA" at 125,88.25 h0.7
  text "3V3" at 76.75,85.75 h0.7
  text "17" at 80.75,85.75 h0.7
  text "13" at 121.5,85.75 h0.7
  text "3V3" at 125,85.75 h0.7
  text "GND" at 76.75,83.25 h0.7
  text "16" at 80.75,83.25 h0.7
  text "12" at 121.5,83.25 h0.7
  text "GND" at 125,83.25 h0.7
  text "15" at 80.75,80.75 h0.7
  text "BRST" at 115.5,80.75 h0.7
  text "38" at 121.5,80.75 h0.7
  text "3V3" at 121.5,78.25 h0.7
  text "46" at 80.5,78 h0.7
  text "MISO" at 76.75,77.25 h0.7
  text "TX-" at 121.5,75.75 h0.7
  text "45" at 80.5,75.5 h0.7
  text "MOSI" at 76.75,74.5 h0.7
  text "9" at 81.25,73 h0.7
  text "TX+" at 121.5,73 h0.7
  text "CLK" at 76.75,72 h0.7
  text "8" at 81.25,70.5 h0.7
  text "RX-" at 121.5,70.5 h0.7
  text "CS1" at 76.75,69.5 h0.7
  text "7" at 81.25,68 h0.7
  text "RX+" at 121.5,68 h0.7
  text "3V3" at 76.75,67 h0.7
  text "6" at 81.25,65.5 h0.7
  text "18" at 121.5,65.5 h0.7
  text "GND" at 76.75,64.5 h0.7
  text "19" at 121.5,63 h0.7
  text "1" at 81.5,62.75 h0.7
  text "0" at 81.25,60.25 h0.7
  text "4" at 121.5,60.25 h0.7
  text "RST" at 80,57.75 h0.7
  text "5" at 121.5,57.75 h0.7
  text "3V3" at 122.75,49.5 h1.52 r90
  text "GND" at 130.25,49.5 h1.52 r90
Top Paste:
  rectangle: 92,86.75 93.75,89.75
Top Solder:
  rectangle: 92,86.75 93.75,89.75
Mechanical 15:
  the board outline again, w0.254

## Text inside footprints (layer, text, board x,y; h text height)
0mega2: Top Overlay "Omega2+" at 95.75,77 h2
MicroUSB: Mechanical 15 "PCB Edge" at 94.825,110.955 h1 r180